# EAGLE board EIB64-ST4-Multi (EAGLE 9.5.2)
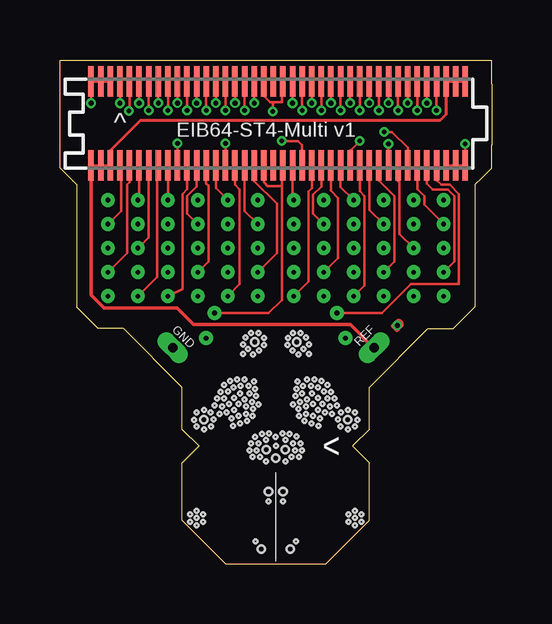
[diagram p0: board, top side]
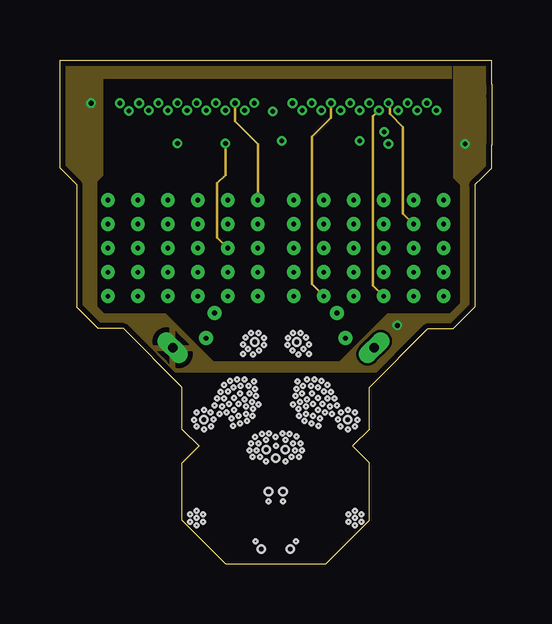
[diagram p1: board, inner layer Route2]
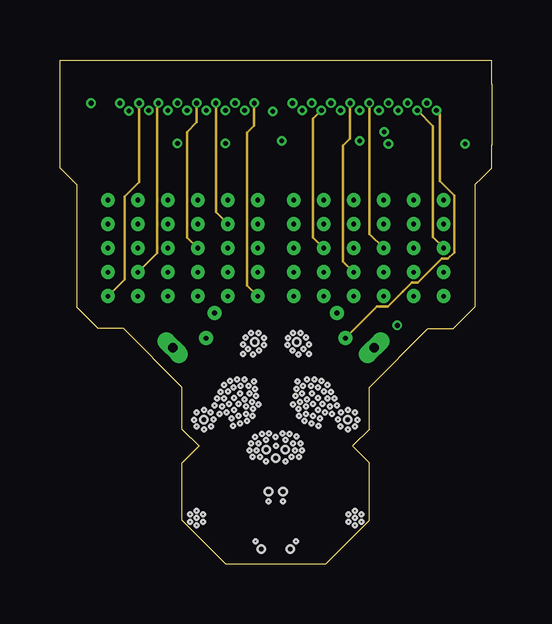
[diagram p2: board, inner layer Route15]
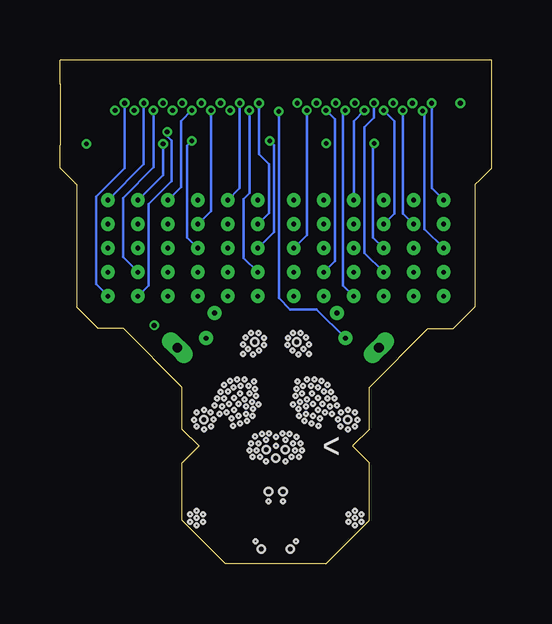
[diagram p3: board, bottom side, seen from below]

Size 18 x 21 mm. Coordinates in mm from the lower left corner, seen from the top.
Outline: 0,21 18,21 18,20 18,19.5 18,17.45 18,16.5 17.5,16 17.4,15.9 17.3,15.8 17.3,10.7 16.4,9.8 15.35,9.8 12.9,7.35 12.9,7.3 12.9,5.6 12.2,4.9 12.9,4.2 12.9,1.8 11.1,0 6.9,0 5.1,1.8 5.1,4.2 5.8,4.9 5.1,5.6 5.1,7.3 5.1,7.35 2.65,9.8 1.6,9.8 0.7,10.7 0.7,15.8 0.5,16 0,16.5 0,17.55 0,21
Copper layers (1+2*15+16): Top 0.018mm / dielectric 0.36mm / Route2 0.035mm / dielectric 0.71mm / Route15 0.035mm / dielectric 0.36mm / Bottom 0.018mm
Design rules "EIB-4Layer_IBR-Rules": minimum track width 0.1mm, minimum drill 0.15mm, track to track 0.1mm, track to pad 0.1mm, pad to pad 0.1mm, via to via 0.1mm, smd to smd 0mil, copper to edge 0.2mm, drill to drill 0.15mm, minimum pad ring 0.125mm, minimum via ring 0.1mm, stop-mask expansion 2mil, vias tented up to drill 0.45mm, thermal gap 0.2mm
Net classes: 1 thick: width 0.102 mm
Holes 0.15 mm at 10.75,6.4 11.05,6.3 10.95,6.65 10.55,6.15 10.55,6.65 10.85,6.05 11.25,6.55 11.35,6.25 10.25,6.55 10.25,6.25 10.3,6.85 10,6.75 9.95,6.45 9.96,6.15 10.75,6.9 10.5,7.1 10.1,7.1 10.15,8.94 10.38,8.74 9.95,8.71 10.38,9.14 11.15,6.89 9.4,5.15 9.72,5.01 12,5.6 12.4,6 12,6.4 11.7,5.72 12.3,6.3 12.3,5.71 11.6,6.01 11.71,6.29 9.7,8.88 9.48,9.11 9.5,9.4 9.72,9.62 10.03,9.62 10.27,9.42 9.81,6.99 9.86,7.29 10.14,7.41 9.9,7.59 10.46,7.41 10.31,7.68 11.55,6.6 11.45,6.88 11.3,7.16 11,7.17 11.16,7.44 10.76,7.35 10.91,7.62 10.61,7.68 9.71,6.63 10.19,5.94 10.49,5.85 10.79,5.73 9.8,4.71 9.66,4.44 9.96,4.44 10.1,4.71 10.03,5.01 9.86,5.29 9.57,5.4 9.28,5.43 9,4.9 9.4,4.27 12.3,1.9 12.3,2.2 12.57,2.05 12.57,1.75 12.3,1.6 12.03,1.75 12.03,2.05 9.3,2.6 9.84,0.93 7.25,6.4 6.95,6.3 7.05,6.65 7.45,6.15 7.45,6.65 7.15,6.05 6.75,6.55 6.65,6.25 7.75,6.55 7.75,6.25 7.7,6.85 8,6.75 8.05,6.45 8.04,6.15 7.25,6.9 7.5,7.1 7.9,7.1 7.85,8.94 7.62,8.74 8.05,8.71 7.62,9.14 6.85,6.89 8.6,5.15 8.28,5.01 6,5.6 5.6,6 6,6.4 6.3,5.72 5.7,6.3 5.7,5.71 6.41,6.01 6.29,6.29 8.3,8.88 8.52,9.11 8.5,9.4 8.28,9.62 7.97,9.62 7.74,9.42 8.19,6.99 8.14,7.29 7.86,7.41 8.1,7.59 7.54,7.41 7.69,7.68 6.45,6.6 6.55,6.88 6.7,7.16 7,7.17 6.83,7.44 7.24,7.35 7.09,7.62 7.39,7.68 8.29,6.63 7.81,5.94 7.51,5.85 7.21,5.73 8.2,4.71 8.34,4.44 8.04,4.44 7.9,4.71 7.97,5.01 8.14,5.28 8.43,5.4 8.72,5.43 8.99,5.28 8.6,4.27 5.7,1.9 5.7,2.2 5.43,2.05 5.43,1.75 5.7,1.6 5.97,1.75 5.97,2.05 8.7,2.6 8.16,0.93
Holes 0.3 mm at 9.88,9.24 9.4,4.75 12,6 9.3,3 9.6,0.6 8.12,9.24 8.6,4.75 6,6 8.7,3 8.4,0.6 9,4.4

## Footprints (pad centres in the part's own frame; a part is rotated, then mirrored left to right if it is on the bottom)
ST4-40-1.00-X-D_BPADS = smd 0.23 x 1.28: 1 -7.8,1.75; 3 -7.4,1.75; 4 -7.4,-1.75; 5 -7,1.75; 6 -7,-1.75; 7 -6.6,1.75; 8 -6.6,-1.75; 9 -6.2,1.75; 10 -6.2,-1.75; 11 -5.8,1.75; 12 -5.8,-1.75; 13 -5.4,1.75; 14 -5.4,-1.75; 15 -5,1.75; 16 -5,-1.75; 17 -4.6,1.75; 18 -4.6,-1.75; 19 -4.2,1.75; 20 -4.2,-1.75; 21 -3.8,1.75; 22 -3.8,-1.75; 23 -3.4,1.75; 24 -3.4,-1.75; 25 -3,1.75; 26 -3,-1.75; 27 -2.6,1.75; 28 -2.6,-1.75; 29 -2.2,1.75; 30 -2.2,-1.75; 31 -1.8,1.75; 32 -1.8,-1.75; 33 -1.4,1.75; 34 -1.4,-1.75; 35 -1,1.75; 36 -1,-1.75; 37 -0.6,1.75; 38 -0.6,-1.75; 39 -0.2,1.75; 40 -0.2,-1.75; 41 0.2,1.75; 42 0.2,-1.75; 43 0.6,1.75; 44 0.6,-1.75; 45 1,1.75; 46 1,-1.75; 47 1.4,1.75; 48 1.4,-1.75; 49 1.8,1.75; 50 1.8,-1.75; 51 2.2,1.75; 52 2.2,-1.75; 53 2.6,1.75; 54 2.6,-1.75; 55 3,1.75; 56 3,-1.75; 57 3.4,1.75; 58 3.4,-1.75; 59 3.8,1.75; 60 3.8,-1.75; 61 4.2,1.75; 62 4.2,-1.75; 63 4.6,1.75; 64 4.6,-1.75; 65 5,1.75; 66 5,-1.75; 67 5.4,1.75; 68 5.4,-1.75; 69 5.8,1.75; 70 5.8,-1.75; 71 6.2,1.75; 72 6.2,-1.75; 73 6.6,1.75; 74 6.6,-1.75; 75 7,1.75; 76 7,-1.75; 77 7.4,1.75; 78 7.4,-1.75; 79 7.8,1.75; 80 7.8,-1.75 | smd 0.23 x 1.26: 2 -7.8,-1.75
EIB-GND-HOLE-PAD-SMALL = drill 0.4 pad 0.76 long: P$1 0,0
JMP-PAD-SMALL = smd 0.305 x 0.152: P$1 0.1,0
EIB-TETRODE-HOLE-RS-PAD = drill 0.2 pad 0.58: P$1 0,0

## Placement (x,y rotation side)
J1  ST4-40-1.00-X-D_BPADS  [ST4-40-1.00-X-D_BPADS]  9.1,18.35 0 top
U$1  EIB-GND-HOLE-PAD-SMALL  [EIB-GND-HOLE-PAD-SMALL]  4.7,9 135 top
U$2  JMP-PAD-SMALL  [JMP-PAD-SMALL]  13.95,9.81 45 top
U$3  EIB-GND-HOLE-PAD-SMALL  [EIB-GND-HOLE-PAD-SMALL]  13.1,9 45 top
U$5  EIB-TETRODE-HOLE-RS-PAD  [EIB-TETRODE-HOLE-RS-PAD]  8.25,12.15 270 top
U$6  EIB-TETRODE-HOLE-RS-PAD  [EIB-TETRODE-HOLE-RS-PAD]  6.45,10.45 0 top
U$7  EIB-TETRODE-HOLE-RS-PAD  [EIB-TETRODE-HOLE-RS-PAD]  8.25,11.15 0 top
U$8  EIB-TETRODE-HOLE-RS-PAD  [EIB-TETRODE-HOLE-RS-PAD]  6.1,9.4 0 top
U$9  EIB-TETRODE-HOLE-RS-PAD  [EIB-TETRODE-HOLE-RS-PAD]  8.25,14.15 0 top
U$10  EIB-TETRODE-HOLE-RS-PAD  [EIB-TETRODE-HOLE-RS-PAD]  7,11.15 0 top
U$11  EIB-TETRODE-HOLE-RS-PAD  [EIB-TETRODE-HOLE-RS-PAD]  7,13.15 211.3 top
U$12  EIB-TETRODE-HOLE-RS-PAD  [EIB-TETRODE-HOLE-RS-PAD]  7,15.15 180 top
U$13  EIB-TETRODE-HOLE-RS-PAD  [EIB-TETRODE-HOLE-RS-PAD]  5.75,12.15 0 top
U$14  EIB-TETRODE-HOLE-RS-PAD  [EIB-TETRODE-HOLE-RS-PAD]  5.75,14.15 0 top
U$15  EIB-TETRODE-HOLE-RS-PAD  [EIB-TETRODE-HOLE-RS-PAD]  4.5,11.15 0 top
U$16  EIB-TETRODE-HOLE-RS-PAD  [EIB-TETRODE-HOLE-RS-PAD]  4.5,13.15 0 top
U$17  EIB-TETRODE-HOLE-RS-PAD  [EIB-TETRODE-HOLE-RS-PAD]  4.5,15.15 0 top
U$18  EIB-TETRODE-HOLE-RS-PAD  [EIB-TETRODE-HOLE-RS-PAD]  3.25,11.15 293.7 top
U$19  EIB-TETRODE-HOLE-RS-PAD  [EIB-TETRODE-HOLE-RS-PAD]  3.25,13.15 90 top
U$20  EIB-TETRODE-HOLE-RS-PAD  [EIB-TETRODE-HOLE-RS-PAD]  3.25,15.15 0 top
U$21  EIB-TETRODE-HOLE-RS-PAD  [EIB-TETRODE-HOLE-RS-PAD]  2,12.15 0 top
U$22  EIB-TETRODE-HOLE-RS-PAD  [EIB-TETRODE-HOLE-RS-PAD]  2,14.15 0 top
U$23  EIB-TETRODE-HOLE-RS-PAD  [EIB-TETRODE-HOLE-RS-PAD]  8.25,13.15 0 top
U$24  EIB-TETRODE-HOLE-RS-PAD  [EIB-TETRODE-HOLE-RS-PAD]  8.25,15.15 0 top
U$25  EIB-TETRODE-HOLE-RS-PAD  [EIB-TETRODE-HOLE-RS-PAD]  7,12.15 0 top
U$26  EIB-TETRODE-HOLE-RS-PAD  [EIB-TETRODE-HOLE-RS-PAD]  7,14.15 0 top
U$27  EIB-TETRODE-HOLE-RS-PAD  [EIB-TETRODE-HOLE-RS-PAD]  5.75,11.15 0 top
U$28  EIB-TETRODE-HOLE-RS-PAD  [EIB-TETRODE-HOLE-RS-PAD]  5.75,13.15 0 top
U$29  EIB-TETRODE-HOLE-RS-PAD  [EIB-TETRODE-HOLE-RS-PAD]  5.75,15.15 0 top
U$30  EIB-TETRODE-HOLE-RS-PAD  [EIB-TETRODE-HOLE-RS-PAD]  4.5,12.15 0 top
U$31  EIB-TETRODE-HOLE-RS-PAD  [EIB-TETRODE-HOLE-RS-PAD]  4.5,14.15 0 top
U$32  EIB-TETRODE-HOLE-RS-PAD  [EIB-TETRODE-HOLE-RS-PAD]  3.25,12.15 0 top
U$33  EIB-TETRODE-HOLE-RS-PAD  [EIB-TETRODE-HOLE-RS-PAD]  3.25,14.15 0 top
U$34  EIB-TETRODE-HOLE-RS-PAD  [EIB-TETRODE-HOLE-RS-PAD]  2,11.15 0 top
U$35  EIB-TETRODE-HOLE-RS-PAD  [EIB-TETRODE-HOLE-RS-PAD]  2,13.15 0 top
U$36  EIB-TETRODE-HOLE-RS-PAD  [EIB-TETRODE-HOLE-RS-PAD]  2,15.15 0 top
U$37  EIB-TETRODE-HOLE-RS-PAD  [EIB-TETRODE-HOLE-RS-PAD]  9.75,15.15 0 top
U$38  EIB-TETRODE-HOLE-RS-PAD  [EIB-TETRODE-HOLE-RS-PAD]  9.75,13.15 0 top
U$39  EIB-TETRODE-HOLE-RS-PAD  [EIB-TETRODE-HOLE-RS-PAD]  9.75,11.15 0 top
U$40  EIB-TETRODE-HOLE-RS-PAD  [EIB-TETRODE-HOLE-RS-PAD]  11,14.15 0 top
U$41  EIB-TETRODE-HOLE-RS-PAD  [EIB-TETRODE-HOLE-RS-PAD]  11,12.15 0 top
U$42  EIB-TETRODE-HOLE-RS-PAD  [EIB-TETRODE-HOLE-RS-PAD]  12.25,15.15 0 top
U$43  EIB-TETRODE-HOLE-RS-PAD  [EIB-TETRODE-HOLE-RS-PAD]  12.25,13.15 0 top
U$44  EIB-TETRODE-HOLE-RS-PAD  [EIB-TETRODE-HOLE-RS-PAD]  12.25,11.15 0 top
U$45  EIB-TETRODE-HOLE-RS-PAD  [EIB-TETRODE-HOLE-RS-PAD]  13.5,14.15 0 top
U$46  EIB-TETRODE-HOLE-RS-PAD  [EIB-TETRODE-HOLE-RS-PAD]  13.5,12.15 0 top
U$47  EIB-TETRODE-HOLE-RS-PAD  [EIB-TETRODE-HOLE-RS-PAD]  14.75,15.15 0 top
U$48  EIB-TETRODE-HOLE-RS-PAD  [EIB-TETRODE-HOLE-RS-PAD]  14.75,13.15 0 top
U$49  EIB-TETRODE-HOLE-RS-PAD  [EIB-TETRODE-HOLE-RS-PAD]  14.75,11.15 0 top
U$50  EIB-TETRODE-HOLE-RS-PAD  [EIB-TETRODE-HOLE-RS-PAD]  16,14.15 0 top
U$51  EIB-TETRODE-HOLE-RS-PAD  [EIB-TETRODE-HOLE-RS-PAD]  16,12.15 0 top
U$52  EIB-TETRODE-HOLE-RS-PAD  [EIB-TETRODE-HOLE-RS-PAD]  11.55,10.45 0 top
U$53  EIB-TETRODE-HOLE-RS-PAD  [EIB-TETRODE-HOLE-RS-PAD]  9.75,14.15 0 top
U$54  EIB-TETRODE-HOLE-RS-PAD  [EIB-TETRODE-HOLE-RS-PAD]  9.75,12.15 0 top
U$55  EIB-TETRODE-HOLE-RS-PAD  [EIB-TETRODE-HOLE-RS-PAD]  11,15.15 0 top
U$56  EIB-TETRODE-HOLE-RS-PAD  [EIB-TETRODE-HOLE-RS-PAD]  11,13.15 0 top
U$57  EIB-TETRODE-HOLE-RS-PAD  [EIB-TETRODE-HOLE-RS-PAD]  11,11.15 0 top
U$58  EIB-TETRODE-HOLE-RS-PAD  [EIB-TETRODE-HOLE-RS-PAD]  12.25,14.15 0 top
U$59  EIB-TETRODE-HOLE-RS-PAD  [EIB-TETRODE-HOLE-RS-PAD]  12.25,12.15 0 top
U$60  EIB-TETRODE-HOLE-RS-PAD  [EIB-TETRODE-HOLE-RS-PAD]  13.5,15.15 0 top
U$61  EIB-TETRODE-HOLE-RS-PAD  [EIB-TETRODE-HOLE-RS-PAD]  13.5,13.15 0 top
U$62  EIB-TETRODE-HOLE-RS-PAD  [EIB-TETRODE-HOLE-RS-PAD]  13.5,11.15 0 top
U$63  EIB-TETRODE-HOLE-RS-PAD  [EIB-TETRODE-HOLE-RS-PAD]  14.75,14.15 0 top
U$64  EIB-TETRODE-HOLE-RS-PAD  [EIB-TETRODE-HOLE-RS-PAD]  14.75,12.15 0 top
U$65  EIB-TETRODE-HOLE-RS-PAD  [EIB-TETRODE-HOLE-RS-PAD]  16,15.15 0 top
U$66  EIB-TETRODE-HOLE-RS-PAD  [EIB-TETRODE-HOLE-RS-PAD]  16,13.15 0 top
U$67  EIB-TETRODE-HOLE-RS-PAD  [EIB-TETRODE-HOLE-RS-PAD]  16,11.15 0 top
U$68  EIB-TETRODE-HOLE-RS-PAD  [EIB-TETRODE-HOLE-RS-PAD]  11.9,9.4 0 top

## Library data of the parts
J1 = ST4-40-1.00-X-D_custom
U$1-U$3 U$5-U$68 = EIBLibrary

## Nets
GND [thick]: J1.1 J1.3 J1.5 J1.76 J1.78 J1.80 U$1.P$1 U$2.P$1
N$1 [thick]: J1.2 J1.4 J1.6 J1.75 J1.77 J1.79 U$3.P$1
N$2 [thick]: J1.35 U$7.P$1
N$3 [thick]: J1.36 U$5.P$1
N$4 [thick]: J1.34 U$9.P$1
N$5 [thick]: J1.20 U$16.P$1
N$6 [thick]: J1.22 U$15.P$1
N$7 [thick]: J1.24 U$14.P$1
N$8 [thick]: J1.26 U$13.P$1
N$9 [thick]: J1.28 U$12.P$1
N$13 [thick]: J1.30 U$11.P$1
N$14 [thick]: J1.37 J1.41 U$8.P$1
N$15 [thick]: J1.32 U$10.P$1
N$16 [thick]: J1.74 U$52.P$1
N$17 [thick]: J1.18 U$17.P$1
N$18 [thick]: J1.16 U$18.P$1
N$19 [thick]: J1.14 U$19.P$1
N$20 [thick]: J1.12 U$20.P$1
N$21 [thick]: J1.10 U$21.P$1
N$22 [thick]: J1.8 U$22.P$1
N$23 [thick]: J1.33 U$23.P$1
N$24 [thick]: J1.31 U$24.P$1
N$25 [thick]: J1.29 U$25.P$1
N$26 [thick]: J1.27 U$26.P$1
N$27 [thick]: J1.25 U$27.P$1
N$28 [thick]: J1.23 U$28.P$1
N$29 [thick]: J1.21 U$29.P$1
N$30 [thick]: J1.19 U$30.P$1
N$31 [thick]: J1.17 U$31.P$1
N$32 [thick]: J1.15 U$32.P$1
N$33 [thick]: J1.13 U$33.P$1
N$34 [thick]: J1.11 U$34.P$1
N$35 [thick]: J1.9 U$35.P$1
N$36 [thick]: J1.7 U$36.P$1
N$37 [thick]: J1.72 U$51.P$1
N$38 [thick]: J1.70 U$50.P$1
N$39 [thick]: J1.68 U$49.P$1
N$40 [thick]: J1.66 U$48.P$1
N$41 [thick]: J1.64 U$47.P$1
N$42 [thick]: J1.62 U$46.P$1
N$43 [thick]: J1.60 U$45.P$1
N$44 [thick]: J1.58 U$44.P$1
N$45 [thick]: J1.56 U$43.P$1
N$46 [thick]: J1.54 U$42.P$1
N$47 [thick]: J1.52 U$41.P$1
N$48 [thick]: J1.50 U$40.P$1
N$49 [thick]: J1.48 U$39.P$1
N$50 [thick]: J1.46 U$38.P$1
N$51 [thick]: J1.44 U$37.P$1
N$52 [thick]: J1.38 J1.42 U$6.P$1
N$53 [thick]: J1.43 U$53.P$1
N$54 [thick]: J1.45 U$54.P$1
N$55 [thick]: J1.47 U$55.P$1
N$56 [thick]: J1.49 U$56.P$1
N$57 [thick]: J1.51 U$57.P$1
N$58 [thick]: J1.53 U$58.P$1
N$59 [thick]: J1.55 U$59.P$1
N$60 [thick]: J1.57 U$60.P$1
N$61 [thick]: J1.59 U$61.P$1
N$62 [thick]: J1.61 U$62.P$1
N$63 [thick]: J1.63 U$63.P$1
N$64 [thick]: J1.65 U$64.P$1
N$65 [thick]: J1.67 U$65.P$1
N$66 [thick]: J1.69 U$66.P$1
N$67 [thick]: J1.71 U$67.P$1
N$68 [thick]: J1.73 U$68.P$1

## Tracks (layer width: path | path; a pad name or v marks a point on that pad's centre or on a via)
GND  (via drill 0.2)
  Top 0.102: J1.5 J1.3 J1.1 v1.3,19.2 | J1.76 J1.78 J1.80 v16.9,17.5 | v14.07,9.93 U$2.P$1
  pour Route2: 0.1,20.9 0.1,16.5 0.75,15.85 0.75,10.85 1.7,9.9 2.7,9.9 4.6,8 13.35,8 15.25,9.9 16.35,9.9 17.25,10.8 17.25,15.85 17.9,16.5 17.9,20.9 16.4,20.9 16.4,16.1 16.7,15.8 16.7,10.85 16.25,10.4 13.65,10.4 11.65,8.4 6.4,8.4 4.4,10.4 1.85,10.4 1.55,10.7 1.55,15.95 1.8,16.2 1.8,20.25 16.35,20.25 16.35,20.9
N$1
  Top 0.102: J1.2 J1.4 J1.6 2.1,17.23 | J1.75 J1.77 J1.79
  Top 0.12: 2.1,17.23 3.35,18.48 15.85,18.48 16.1,18.73 J1.75
  Top 0.14: U$3.P$1 13.08,9 12.12,9.96 5.57,9.96 4.88,10.65 1.85,10.65 1.3,11.2 J1.2
N$2  (via drill 0.2)
  Top 0.102: J1.35 v8.1,19.21 v8.1,19.2
  Route15 0.102: U$7.P$1 7.81,11.59 7.81,17.96 8.1,18.25 v8.1,19.2
N$3
  Top 0.102: U$5.P$1 9.05,12.95 9.05,15 8.1,15.95 J1.36
N$4
  Top 0.102: J1.34 7.7,14.7 U$9.P$1
N$5  (via drill 0.2)
  Top 0.102: J1.20 v4.9,17.52
  Bottom 0.102: U$16.P$1 4.95,13.6 4.95,17.48 v4.9,17.52
N$6
  Top 0.102: U$15.P$1 5.11,11.45 5.11,15.42 5.3,15.61 J1.22
N$7
  Top 0.102: J1.24 5.7,15.72 5.31,15.33 5.31,14.59 U$14.P$1
N$8
  Top 0.102: U$13.P$1 6.19,12.59 6.19,15.76 6.1,15.85 J1.26
N$9
  Top 0.102: U$12.P$1 6.5,15.65 J1.28
N$13  (via drill 0.2)
  Top 0.102: J1.30 v6.9,17.52
  Route2 0.102: U$11.P$1 6.56,13.59 6.56,15.86 6.9,16.2 v6.9,17.52
N$14  (via drill 0.2)
  Top 0.102: 8.88,19.25 v8.88,18.85 | 8.88,19.25 8.75,19.25 8.5,19.5 J1.37 | 8.88,19.25 9.25,19.25 9.25,20 J1.41
  Bottom 0.102: v8.88,18.85 8.88,11.25 8.88,11.07 8.4,10.6 7.3,10.6 U$8.P$1
N$15
  Top 0.102: U$10.P$1 7.5,11.65 7.5,15.6 7.3,15.8 J1.32
N$16
  Top 0.102: J1.74 15.7,16 15.9,15.8 16.26,15.8 16.64,15.42 16.64,11.66 14.64,11.66 13.43,10.45 U$52.P$1
N$17
  Top 0.102: J1.18 U$17.P$1
N$18
  Top 0.102: J1.16 4.12,16.5 4.05,16.43 4.05,11.95 U$18.P$1
N$19
  Top 0.102: J1.14 3.7,13.6 U$19.P$1
N$20
  Top 0.102: J1.12 3.3,15.2 U$20.P$1
N$21
  Top 0.102: U$21.P$1 2.8,12.95 2.8,15.8 2.9,15.9 J1.10
N$22
  Top 0.102: J1.8 2.55,16.55 2.55,14.7 U$22.P$1
N$23  (via drill 0.2)
  Top 0.102: J1.33 v7.7,18.9
  Bottom 0.102: v7.7,18.9 7.7,13.7 U$23.P$1
N$24  (via drill 0.2)
  Top 0.102: J1.31 v7.3,19.21 v7.3,19.2
  Route2 0.102: v7.3,19.2 7.3,18.45 8.25,17.5 U$24.P$1
N$25  (via drill 0.2)
  Top 0.102: J1.29 v6.9,18.9
  Bottom 0.102: v6.9,18.9 6.53,18.52 6.53,12.62 U$25.P$1
N$26  (via drill 0.2)
  Top 0.102: J1.27 v6.5,19.21 v6.5,19.2
  Route15 0.102: U$26.P$1 6.5,14.65 v6.5,19.2
N$27  (via drill 0.2)
  Top 0.102: J1.25 v6.1,18.9
  Bottom 0.102: U$27.P$1 6.2,11.6 6.2,18.8 v6.1,18.9
N$28  (via drill 0.2)
  Top 0.102: J1.23 v5.7,19.21 v5.7,19.2
  Route15 0.102: U$28.P$1 5.3,13.6 5.3,18 5.7,18.4 v5.7,19.2
N$29  (via drill 0.2)
  Top 0.102: J1.21 v5.3,18.9
  Bottom 0.102: U$29.P$1 5.75,18.45 v5.3,18.9
N$30  (via drill 0.2)
  Top 0.102: J1.19 v4.9,19.21 v4.9,19.2
  Bottom 0.102: U$30.P$1 5.3,12.95 5.3,18.2 4.9,18.6 v4.9,19.2
N$31  (via drill 0.2)
  Top 0.102: J1.17 v4.5,18.9
  Bottom 0.102: v4.5,18.9 4.06,18.45 4.06,14.59 U$31.P$1
N$32  (via drill 0.2)
  Top 0.102: J1.15 v4.1,19.21 v4.1,19.2
  Route15 0.102: v4.1,19.2 4.05,19.15 4.05,12.95 U$32.P$1
N$33  (via drill 0.2)
  Top 0.102: J1.13 v3.7,18.9
  Bottom 0.102: U$33.P$1 3.7,14.6 v3.7,18.9
N$34  (via drill 0.2)
  Top 0.102: J1.11 v3.3,19.2
  Route15 0.102: v3.3,19.2 3.3,15.9 2.7,15.3 2.7,11.85 U$34.P$1
N$35  (via drill 0.2)
  Top 0.102: J1.9 2.9,18.89 v2.88,18.87
  Bottom 0.102: U$35.P$1 2.8,13.95 2.8,18.79 v2.88,18.87
N$36  (via drill 0.2)
  Top 0.102: J1.7 v2.5,19.2
  Bottom 0.102: v2.5,19.2 2.5,15.65 U$36.P$1
N$37
  Top 0.102: U$51.P$1 16.44,12.59 16.44,15.33 16.17,15.6 15.55,15.6 15.3,15.85 J1.72
N$38
  Top 0.102: U$50.P$1 15.19,14.96 15.19,15.33 14.9,15.62 J1.70
N$39  (via drill 0.2)
  Top 0.102: v13.53,18 13.85,18 14.5,17.35 J1.68
  Bottom 0.102: v13.53,18 13.53,17.82 13.35,17.64 13.35,17.36 13.35,17.35 13.35,15.95 14.31,14.99 14.31,11.59 U$49.P$1
N$40
  Top 0.102: J1.66 14.1,15.95 14.15,15.9 14.15,13.75 U$48.P$1
N$41  (via drill 0.2)
  Top 0.102: J1.64 v13.7,17.5
  Bottom 0.102: v13.7,17.5 13.7,16.2 U$47.P$1
N$42
  Top 0.102: J1.62 13.3,15.97 13.95,15.32 13.95,12.6 U$46.P$1
N$43
  Top 0.102: U$45.P$1 12.9,14.75 J1.60
N$44
  Top 0.102: J1.58 12.5,15.52 12.69,15.33 12.69,11.59 U$44.P$1
N$45  (via drill 0.2)
  Top 0.102: v12.5,17.62 12.12,17.25 12.12,16.62 J1.56
  Bottom 0.102: U$43.P$1 12.69,13.59 12.69,17.43 v12.5,17.62
N$46
  Top 0.102: U$42.P$1 11.7,15.7 J1.54
N$47
  Top 0.102: U$41.P$1 11.6,12.75 11.6,15.25 11.3,15.55 J1.52
N$48
  Top 0.102: J1.50 10.9,15.72 10.56,15.38 10.56,14.59 U$40.P$1
N$49
  Top 0.102: J1.48 10.5,15.66 10.36,15.52 10.36,11.76 U$39.P$1
N$50  (via drill 0.2)
  Top 0.102: J1.46 10.1,17.45 9.93,17.62 v9.25,17.62
  Bottom 0.102: v9.25,17.62 9.08,17.45 9.08,14.25 9.08,13.82 U$38.P$1
N$51
  Top 0.102: J1.44 9.7,15.2 U$37.P$1
N$52
  Top 0.102: 9.25,15.75 9.25,16.5 J1.42 | J1.38 8.5,15.9 8.65,15.75 9.25,15.75 | 9.25,15.75 9.25,11 8.7,10.45 U$6.P$1
N$53  (via drill 0.2)
  Top 0.102: J1.43 v9.7,19.2
  Bottom 0.102: U$53.P$1 9.28,14.62 9.28,16.65 9.7,17.07 v9.7,19.2
N$54  (via drill 0.2)
  Top 0.102: J1.45 v10.1,18.9
  Bottom 0.102: v10.1,18.9 10.1,15.45 10.35,15.2 10.35,12.75 U$54.P$1
N$55  (via drill 0.2)
  Top 0.102: J1.47 v10.5,19.21 v10.5,19.2
  Bottom 0.102: U$55.P$1 10.5,15.65 v10.5,19.2
N$56  (via drill 0.2)
  Top 0.102: J1.49 v10.9,18.9
  Route15 0.102: U$56.P$1 10.55,13.6 10.55,18.54 v10.9,18.9
N$57  (via drill 0.2)
  Top 0.102: J1.51 v11.3,19.21 v11.3,19.2
  Route2 0.102: v11.3,19.2 11.3,18.6 10.5,17.8 10.5,11.65 U$57.P$1
N$58  (via drill 0.2)
  Top 0.102: J1.53 v11.7,18.9
  Bottom 0.102: v11.7,18.9 11.7,14.7 U$58.P$1
N$59  (via drill 0.2)
  Top 0.102: J1.55 v12.1,19.21 v12.1,19.2
  Route15 0.102: v12.1,19.2 12.1,17.73 11.81,17.43 11.81,12.59 U$59.P$1
N$60  (via drill 0.2)
  Top 0.102: J1.57 v12.5,18.9
  Bottom 0.102: U$60.P$1 12.95,15.7 12.95,18.45 v12.5,18.9
N$61  (via drill 0.2)
  Top 0.102: J1.59 v12.9,19.21 v12.9,19.2
  Route15 0.102: U$61.P$1 12.9,13.75 v12.9,19.2
N$62  (via drill 0.2)
  Top 0.102: J1.61 v13.3,18.9
  Route2 0.102: U$62.P$1 13.06,11.59 13.06,18.65 v13.3,18.9
N$63  (via drill 0.2)
  Top 0.102: J1.63 v13.7,19.21 v13.7,19.2
  Route2 0.102: U$63.P$1 14.3,14.6 14.3,18.2 13.75,18.75 13.75,19.15 v13.7,19.2
N$64  (via drill 0.2)
  Top 0.102: J1.65 v14.1,18.9
  Bottom 0.102: v14.1,18.9 14.1,16.52 15.38,15.25 15.38,13.05 15.38,12.78 U$64.P$1
N$65  (via drill 0.2)
  Top 0.102: J1.67 v14.5,19.21 v14.5,19.2
  Bottom 0.102: U$65.P$1 14.5,16.65 v14.5,19.2
N$66  (via drill 0.2)
  Top 0.102: J1.69 v14.9,18.9
  Route15 0.102: U$66.P$1 16,13.18 15.56,13.62 15.56,18.24 v14.9,18.9
N$67  (via drill 0.2)
  Top 0.102: J1.71 v15.3,19.21 v15.3,19.2
  Bottom 0.102: v15.3,19.2 15.3,16.5 16.5,15.3 16.5,11.65 U$67.P$1
N$68  (via drill 0.2)
  Top 0.102: J1.73 v15.7,18.9
  Route15 0.102: v15.7,18.9 15.85,18.75 15.85,15.95 16.45,15.35 16.45,12.98 16.18,12.71 15.93,12.71 14.93,11.71 14.67,11.71 14.31,11.35 14.31,11.34 13.68,10.71 13.21,10.71 U$68.P$1

## Text on the board
tNames: ^ | EIB64-ST4-Multi v1 | REF | GND | ^
bNames: ^